# EAGLE board 4Servo-Sweep (EAGLE 9.7.0)

Size 82.4 x 96.85 mm. Coordinates in mm from the lower left corner, seen from the top.
Outline: 0,0 82.4,0 82.4,96.85 0,96.85 0,0
Copper layers (1*16): Top 0.035mm / dielectric 1.5mm / Bottom 0.035mm
Design rules "default": minimum track width 6mil, minimum drill 0.35mm, track to track 6mil, track to pad 6mil, pad to pad 6mil, via to via 6mil, smd to smd 6mil, copper to edge 40mil, drill to drill 6mil, minimum pad ring 10mil, minimum via ring 8mil, stop-mask expansion 4mil, vias tented up to drill 0mil, thermal gap 10mil

## Footprints (pad centres in the part's own frame; a part is rotated, then mirrored left to right if it is on the bottom)
SG90 = drill 1.016 long: 1 -2.54,0; 2 0,0; 3 2.54,0
ARDUINO-UNO-R3-SHIELD = drill 1.016 pad 1.88: 3.3V 24.13,-2.54; 5V 24.13,0; A0 24.13,12.7; A1 24.13,15.24; A2 24.13,17.78; A3 24.13,20.32; A4 24.13,22.86; A5 24.13,25.4; AREF -24.13,-13.97; D2 -24.13,20.32; D3 -24.13,17.78; D4 -24.13,15.24; D5 -24.13,12.7; D6 -24.13,10.16; D7 -24.13,7.62; D8 -24.13,3.81; D9 -24.13,1.27; D10 -24.13,-1.27; D11 -24.13,-3.81; D12 -24.13,-6.35; D13 -24.13,-8.89; GND@0 24.13,2.54; GND@1 24.13,5.08; GND@2 -24.13,-11.43; IOREF 24.13,-7.62; NC 24.13,-10.16; RES 24.13,-5.08; RX -24.13,25.4; SCL -24.13,-19.05; SDA -24.13,-16.51; TX -24.13,22.86; VIN 24.13,7.62

## Placement (x,y rotation side)
SERVOSERVO_1  SERVOSG90  [SG90]  12.57,22.37 270 top
SERVOSERVO_2  SERVOSG90  [SG90]  12.18,6.99 270 top
SERVOSERVO_3  SERVOSG90  [SG90]  58.66,10.79 90 top
SERVOSERVO_4  SERVOSG90  [SG90]  59.23,27.23 90 top
U1  ARDUINO-UNO-R3-SHIELD  [ARDUINO-UNO-R3-SHIELD]  47.88,67.01 270 top

## Library data of the parts
SERVOSERVO_1-SERVOSERVO_4 U1 = Tinkercad

## Nets
U1_5V: SERVOSERVO_1.2 SERVOSERVO_2.2 SERVOSERVO_3.2 SERVOSERVO_4.2 U1.5V
U1_D3: SERVOSERVO_1.3 U1.D3
U1_D5: SERVOSERVO_2.3 U1.D5
U1_D6: SERVOSERVO_3.3 U1.D6
U1_D9: SERVOSERVO_4.3 U1.D9
U1_GND: SERVOSERVO_1.1 SERVOSERVO_2.1 SERVOSERVO_3.1 SERVOSERVO_4.1 U1.GND@0 U1.GND@1 U1.GND@2

## Tracks (layer width: path | path; a pad name or v marks a point on that pad's centre or on a via)
U1_5V  (4 unrouted)
U1_D3  (1 unrouted)
U1_D5  (1 unrouted)
U1_D6  (1 unrouted)
U1_D9  (1 unrouted)
U1_GND  (6 unrouted)